# EAGLE board 0805_0603_0402 (EAGLE 9.4.2)
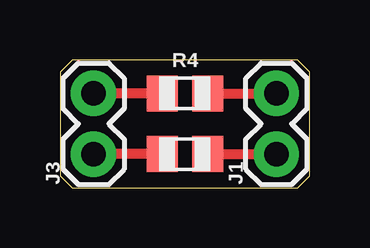
[diagram p0: board, top side]
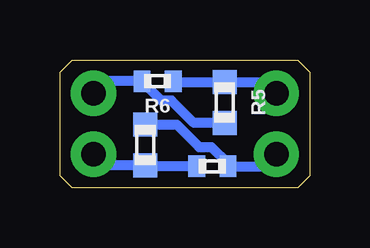
[diagram p1: board, bottom side, seen from below]

Size 10.41 x 5.33 mm. Coordinates in mm from the lower left corner, seen from the top.
Outline: 10.41,0.5 10.41,4.83 9.91,5.33 0.5,5.33 0,4.83 0,0.5 0.5,0 9.91,0 10.41,0.5
Copper layers (1*16): Top 0.035559375mm / dielectric 1.6mm / Bottom 0.035559375mm
Design rules "oshpark-2layer": minimum track width 6mil, minimum drill 10mil, track to track 6mil, track to pad 6mil, pad to pad 6mil, via to via 6mil, smd to smd 6mil, copper to edge 15mil, drill to drill 6mil, minimum pad ring 5mil, minimum via ring 5mil, stop-mask expansion 2.5mil, vias tented up to drill 0mil, thermal gap 10mil

## Footprints (pad centres in the part's own frame; a part is rotated, then mirrored left to right if it is on the bottom)
1X02 = drill 1.016 pad 1.88: 1 0,0; 2 2.54,0
R0805 = smd 1.3 x 1.5: 1 -0.95,0; 2 0.95,0
R0603 = smd 1 x 1: 1 -0.85,0; 2 0.85,0
R0402 = smd 0.7 x 0.9: 1 -0.65,0; 2 0.65,0

## Placement (x,y rotation side)
J1  [1X02]  9.02,1.4 90 top
J3  [1X02]  1.4,1.4 90 top
R1  [R0805]  5.21,1.4 0 top
R2  [R0603]  6.86,1.78 270 bottom
R3  [R0402]  4.06,0.89 180 bottom
R4  [R0805]  5.21,3.94 0 top
R5  [R0603]  3.56,3.56 270 bottom
R6  [R0402]  6.35,4.45 180 bottom

## Library data of the parts
J1 J3 = bschulz
R1 R4 = bschulz_passives
R2 R3 R5 R6 = bschulz_passives; MF: Yageo

## Nets
R1_A: J3.1 R1.1 R2.1 R3.1
R1_B: J1.1 R1.2 R2.2 R3.2
R2_A: J3.2 R4.1 R5.1 R6.1
R2_B: J1.2 R4.2 R5.2 R6.2

## Tracks (layer width: path | path; a pad name or v marks a point on that pad's centre or on a via)
R1_A
  Top 0.406: R1.1 J3.1
  Bottom 0.406: J3.1 1.91,0.89 R3.1 3.41,1 4.11,1.7 4.62,1.7 5.55,2.63 R2.1
R1_B
  Top 0.406: R1.2 J1.1
  Bottom 0.406: J1.1 8.55,0.93 R2.2 6.82,0.89 R3.2
R2_A
  Top 0.406: R4.1 J3.2
  Bottom 0.406: J3.2 1.87,4.41 R5.1 5.66,4.41 R6.1
R2_B
  Top 0.406: R4.2 J1.2
  Bottom 0.406: J1.2 8.51,4.45 R6.2 6.2,3.64 5.77,3.64 4.84,2.71 R5.2

## Text on the board
tDocu: 0805
bDocu: 0402 | 0603 | 0402